# EAGLE board board (EAGLE 8.2.2)

Size 100 x 80 mm. Coordinates in mm from the lower left corner, seen from the top.
Outline: 0,0 100,0 100,80 0,80 0,0
Copper layers (1*16): Top 0.035mm / dielectric 1.5mm / Bottom 0.035mm
Design rules "default": minimum track width 6mil, minimum drill 0.35mm, track to track 6mil, track to pad 6mil, pad to pad 6mil, via to via 6mil, smd to smd 6mil, copper to edge 40mil, drill to drill 6mil, minimum pad ring 10mil, minimum via ring 8mil, stop-mask expansion 4mil, vias tented up to drill 0mil, thermal gap 10mil

## Footprints (pad centres in the part's own frame; a part is rotated, then mirrored left to right if it is on the bottom)
EIA0603 = smd 0.65 x 0.9: 1 -0.8,0; 2 0.8,0
0603 = smd 1.1 x 1: 1 -0.85,0; 2 0.85,0
PIN_1X3 = drill 1 pad 1.676 square: 1 -2.54,0 | drill 1 pad 1.778 octagon: 2 0,0; 3 2.54,0
0603' = smd 0.9 x 0.8: ANODE -0.8,0; CATHODE 0.8,0
NANOSMDC035F = smd 1 x 1.6: 1 -1.5,0; 2 1.5,0
TQFP-32 = smd 1.2 x 0.5: 1 -4.4,2.8; 2 -4.4,2; 3 -4.4,1.2; 4 -4.4,0.4; 5 -4.4,-0.4; 6 -4.4,-1.2; 7 -4.4,-2; 8 -4.4,-2.8; 17 4.4,-2.8; 18 4.4,-2; 19 4.4,-1.2; 20 4.4,-0.4; 21 4.4,0.4; 22 4.4,1.2; 23 4.4,2; 24 4.4,2.8 | smd 0.5 x 1.2: 9 -2.8,-4.4; 10 -2,-4.4; 11 -1.2,-4.4; 12 -0.4,-4.4; 13 0.4,-4.4; 14 1.2,-4.4; 15 2,-4.4; 16 2.8,-4.4; 25 2.8,4.4; 26 2,4.4; 27 1.2,4.4; 28 0.4,4.4; 29 -0.4,4.4; 30 -1.2,4.4; 31 -2,4.4; 32 -2.8,4.4
TO220H = drill 1.118 long: 1 -2.54,-10.16; 2 0,-10.16; 3 2.54,-10.16 | hole 3.302: 0,4.826
SOT-23-5 = smd 0.6 x 1.05: 1 -0.95,-1.3; 2 0,-1.3; 3 0.95,-1.3; 4 0.95,1.3; 5 -0.95,1.3
QFN-20_FT231X = smd 1.2 x 0.3: 1 -2.1,1; 2 -2.1,0.5; 3 -2.1,0; 4 -2.1,-0.5; 5 -2.1,-1; 11 2.1,-1; 12 2.1,-0.5; 13 2.1,0; 14 2.1,0.5; 15 2.1,1 | smd 0.3 x 1.2: 6 -1,-2.1; 7 -0.5,-2.1; 8 0,-2.1; 9 0.5,-2.1; 10 1,-2.1; 16 1,2.1; 17 0.5,2.1; 18 0,2.1; 19 -0.5,2.1; 20 -1,2.1 | smd 1.9 x 1.9: 21 0,0
TC2030 = smd 0.787 x 0.787: 1 -1.27,-0.635; 2 -1.27,0.635; 3 0,-0.635; 4 0,0.635; 5 1.27,-0.635; 6 1.27,0.635 | hole 0.889: -2.54,0; 2.54,-1.016; 2.54,1.016
SOT23-3 = smd 0.8 x 1: 1 -0.95,-1; 2 0.95,-1; 3 0,1
AXL-REGULAR = drill 1 pad 1.93 octagon: 1 -3.81,0; 2 3.81,0
KMR2 = smd 0.9 x 1: 1 -2.05,0.8; 2 2.05,0.8; 3 2.05,-0.8; 4 -2.05,-0.8
PKM13EPYH4000-A0 = drill 1 pad 1.93 octagon: 1 -2.5,0; 2 2.5,0
PJ-102A = drill 3 pad 4.8: RING 0.1,-3.39; RING_SW -4.6,-6.29; TIP 0.1,-9.29
MICROCHIP-RN42 = smd 1.3 x 0.8: 1 -6.7,3.4; 2 -6.7,2.2; 3 -6.7,1; 4 -6.7,-0.2; 5 -6.7,-1.4; 6 -6.7,-2.6; 7 -6.7,-3.8; 8 -6.7,-5; 9 -6.7,-6.2; 10 -6.7,-7.4; 11 -6.7,-8.6; 12 -6.7,-9.8; 13 6.7,-9.8; 14 6.7,-8.6; 15 6.7,-7.4; 16 6.7,-6.2; 17 6.7,-5; 18 6.7,-3.8; 19 6.7,-2.6; 20 6.7,-1.4; 21 6.7,-0.2; 22 6.7,1; 23 6.7,2.2; 24 6.7,3.4 | smd 0.8 x 1.3: 28 3.1,-12.7; 29 -3.1,-12.7; 30 4.1,-12.7; 31 1.9,-12.7; 32 0.7,-12.7; 33 -0.5,-12.7; 34 -1.7,-12.7; 35 -4.1,-12.7
ZX62R-B-5P = smd 0.4 x 1.35: 1 1.3,4.2; 2 0.65,4.2; 3 0,4.2; 4 -0.65,4.2; 5 -1.3,4.2 | smd 2 x 2: 6 3.15,3.8; 7 -3.15,3.8 | smd 1.6 x 1.9: 8 4.1,1.45; 11 -4.1,1.45 | smd 1.1 x 1.8: 9 0.85,1.45; 10 -0.85,1.45
CSTCE_V = smd 0.5 x 1.6: 1 -0.95,0; 3 0.95,0 | smd 0.3 x 1.6: 2 0,0

## Placement (x,y rotation side)
C1  47pF  [EIA0603]  -19.05,55.88 0 top  (outside the outline)
C2  47pF  [EIA0603]  -22.86,55.88 0 top  (outside the outline)
C3  0.1uF  [EIA0603]  -49.53,52.07 0 top  (outside the outline)
C4  4.7uF  [EIA0603]  -54.61,52.07 0 top  (outside the outline)
C5  0.1uF  [EIA0603]  -15.24,55.88 0 top  (outside the outline)
C6  0.1uF  [0603]  -20.32,52.07 0 top  (outside the outline)
C7  0.1uF  [0603]  -25.4,52.07 0 top  (outside the outline)
C8  1uF  [0603]  -39.37,52.07 0 top  (outside the outline)
C9  0.01uF  [0603]  -54.61,46.99 0 top  (outside the outline)
C10  2.2uF  [0603]  -30.48,52.07 0 top  (outside the outline)
C11  0.1uF  [0603]  -35.56,52.07 0 top  (outside the outline)
C12  0.33uF  [0603]  -15.24,52.07 0 top  (outside the outline)
CN1  [PIN_1X3]  -29.21,43.18 0 top  (outside the outline)
CON  BLUE  [0603']  -30.48,46.99 0 top  (outside the outline)
F1  [NANOSMDC035F]  -35.56,46.99 0 top  (outside the outline)
IC1  [TQFP-32]  -30.48,33.02 0 top  (outside the outline)
IC2  7805T  [TO220H]  -36.83,12.7 0 top  (outside the outline)
IC3  [SOT-23-5]  -20.32,41.91 0 top  (outside the outline)
IC4  [QFN-20_FT231X]  -50.8,30.48 0 top  (outside the outline)
JP1  AVR_ISP  [TC2030]  -43.18,41.91 0 top  (outside the outline)
PWRLED  RED  [0603']  -50.8,40.64 0 top  (outside the outline)
Q1  BSS138  [SOT23-3]  -57.15,30.48 0 top  (outside the outline)
Q2  BSS138  [SOT23-3]  -15.24,41.91 0 top  (outside the outline)
R1  27  [EIA0603]  -26.67,55.88 0 top  (outside the outline)
R2  27  [EIA0603]  -29.21,55.88 0 top  (outside the outline)
R3  1k  [0603]  -33.02,55.88 0 top  (outside the outline)
R4  1k  [0603]  -36.83,55.88 0 top  (outside the outline)
R5  1k  [0603]  -40.64,55.88 0 top  (outside the outline)
R6  1k  [0603]  -44.45,55.88 0 top  (outside the outline)
R7  1k  [AXL-REGULAR]  -46.99,48.26 0 top  (outside the outline)
R8  10k  [0603]  -48.26,55.88 0 top  (outside the outline)
R9  10k  [0603]  -52.07,55.88 0 top  (outside the outline)
R10  10k  [0603]  -55.88,55.88 0 top  (outside the outline)
R11  10k  [0603]  -15.24,59.69 0 top  (outside the outline)
R12  10k  [0603]  -19.05,59.69 0 top  (outside the outline)
R13  1k  [0603]  -22.86,59.69 0 top  (outside the outline)
R14  1k  [0603]  -26.67,59.69 0 top  (outside the outline)
RX_LED  BLUE  [0603']  -55.88,40.64 0 top  (outside the outline)
S1  [KMR2]  -36.83,40.64 0 top  (outside the outline)
STAT  GREEN  [0603']  -25.4,46.99 0 top  (outside the outline)
TX_LED  GREEN  [0603']  -15.24,46.99 0 top  (outside the outline)
U1  [PKM13EPYH4000-A0]  -19.05,33.02 0 top  (outside the outline)
U$2  [LOGO_FABO_S_BOTTOM]  -44.45,52.07 0 top  (outside the outline)
U$3  2.1MMJACKTHM  [PJ-102A]  -49.53,12.7 0 top  (outside the outline)
U$4  MICROCHIP-RN42  [MICROCHIP-RN42]  -20.32,13.97 0 top  (outside the outline)
USB1  [ZX62R-B-5P]  -41.91,29.21 0 top  (outside the outline)
USRLED  GREEN  [0603']  -20.32,46.99 0 top  (outside the outline)
Y1  16MHz  [CSTCE_V]  -39.37,46.99 0 top  (outside the outline)

## Library data of the parts
C1-C5 F1 IC4 R1 R2 USB1 = u-aizu
C6-C12 = FaBo-Capacitor
CN1 JP1 = FaBo-PIN
CON PWRLED RX_LED STAT TX_LED USRLED = FaBo-LED
IC1 = FaBo-MPU
IC2 U$3 = adafruit
IC3 = FaBo-Supply
Q1 Q2 Y1 = FaBo-etc
R3-R14 = FaBo-Resistors
S1 = FaBo-Switch
U1 = FaBo-Parts
U$2 = FaBo-Logo
U$4 = FaBo-BT

## Nets
3V3: C5.2 IC4.10 IC4.11 IC4.20
5V: C3.2 C4.2 C8.2 C12.2 CN1.1 F1.2 IC1.4 IC1.6 IC1.18 IC2.3 IC3.1 IC3.3 IC4.12 JP1.2 R3.2 R4.2 R5.2 R8.2 R10.2 R12.2
A0: CN1.3 IC1.23
A1: IC1.24
A2: IC1.25
A3: IC1.26
A4: IC1.27
A5: IC1.28
D2: IC1.32 R6.2 R7.1
D3: IC1.1
D4: IC1.2
D5: IC1.9
D6: IC1.10
D7: IC1.11
D8: IC1.12
D9: IC1.13
D10: IC1.14
DM: C2.2 R2.1 USB1.3
DP: C1.2 R1.1 USB1.2
DTR: C6.1 IC4.18
GND: C1.1 C2.1 C3.1 C4.1 C5.1 C7.1 C8.1 C9.1 C10.1 C12.1 CN1.2 CON.CATHODE IC1.3 IC1.5 IC1.21 IC2.2 IC3.2 IC4.3 IC4.6 IC4.13 IC4.21 JP1.6 PWRLED.CATHODE S1.3 S1.4 STAT.CATHODE U$3.RING U$3.RING_SW U$4.1 U$4.4 U$4.12 U$4.28 U$4.29 USB1.5 USRLED.CATHODE Y1.2
GND1: U1.2
MISO: IC1.16 JP1.1 Q1.3 R10.1
MOSI: IC1.15 JP1.4
N$1: R3.1 TX_LED.ANODE
N$2: C7.2 IC1.20
N$3: IC1.8 Y1.3
N$4: IC1.7 Y1.1
N$5: C9.2 IC3.4
N$6: F1.1 USB1.1
N$7: R4.1 RX_LED.ANODE
N$8: R13.2 U$4.21
N$9: R14.2 U$4.19
N$10: R13.1 STAT.ANODE
N$11: CON.ANODE R14.1
N$13: PWRLED.ANODE R5.1
N$14: R7.2 U1.1
N$15: R6.1 USRLED.ANODE
N$32: IC2.1 U$3.TIP
RESET: C6.2 IC1.29 JP1.5 R8.1 S1.1 S1.2
RX_LV: Q1.2 R9.1 U$4.14
RXD: IC1.30 IC4.17
RXLED: IC4.14 RX_LED.CATHODE
SCK: IC1.17 JP1.3 Q2.3 R12.1
TX_LV: Q2.2 R11.1 U$4.13
TXD: IC1.31 IC4.1
TXLED: IC4.7 TX_LED.CATHODE
USBDM: IC4.9 R1.2
USBDP: IC4.8 R2.2
VREG: C10.2 IC3.5 Q1.1 Q2.1 R9.2 R11.2 U$4.11

## Tracks (layer width: path | path; a pad name or v marks a point on that pad's centre or on a via)
3V3  (3 unrouted)
5V  (19 unrouted)
A0  (1 unrouted)
D2  (2 unrouted)
DM  (2 unrouted)
DP  (2 unrouted)
DTR  (1 unrouted)
GND  (35 unrouted)
MISO  (3 unrouted)
MOSI  (1 unrouted)
N$1  (1 unrouted)
N$2  (1 unrouted)
N$3  (1 unrouted)
N$4  (1 unrouted)
N$5  (1 unrouted)
N$6  (1 unrouted)
N$7  (1 unrouted)
N$8  (1 unrouted)
N$9  (1 unrouted)
N$10  (1 unrouted)
N$11  (1 unrouted)
N$13  (1 unrouted)
N$14  (1 unrouted)
N$15  (1 unrouted)
N$32  (1 unrouted)
RESET  (5 unrouted)
RX_LV  (2 unrouted)
RXD  (1 unrouted)
RXLED  (1 unrouted)
SCK  (3 unrouted)
TX_LV  (2 unrouted)
TXD  (1 unrouted)
TXLED  (1 unrouted)
USBDM  (1 unrouted)
USBDP  (1 unrouted)
VREG  (6 unrouted)